# Altium PCB MainBoard_System_pcb.PcbDoc (part 2 of 3)
Units mm, origin at the board's own origin, x right, y up, seen from the top; angles counter-clockwise.
Board outline 57.35 x 57.35 mm, 2 copper layers (Top Layer, Bottom Layer); 82 components, 64 nets, 322 pads, 173 vias.
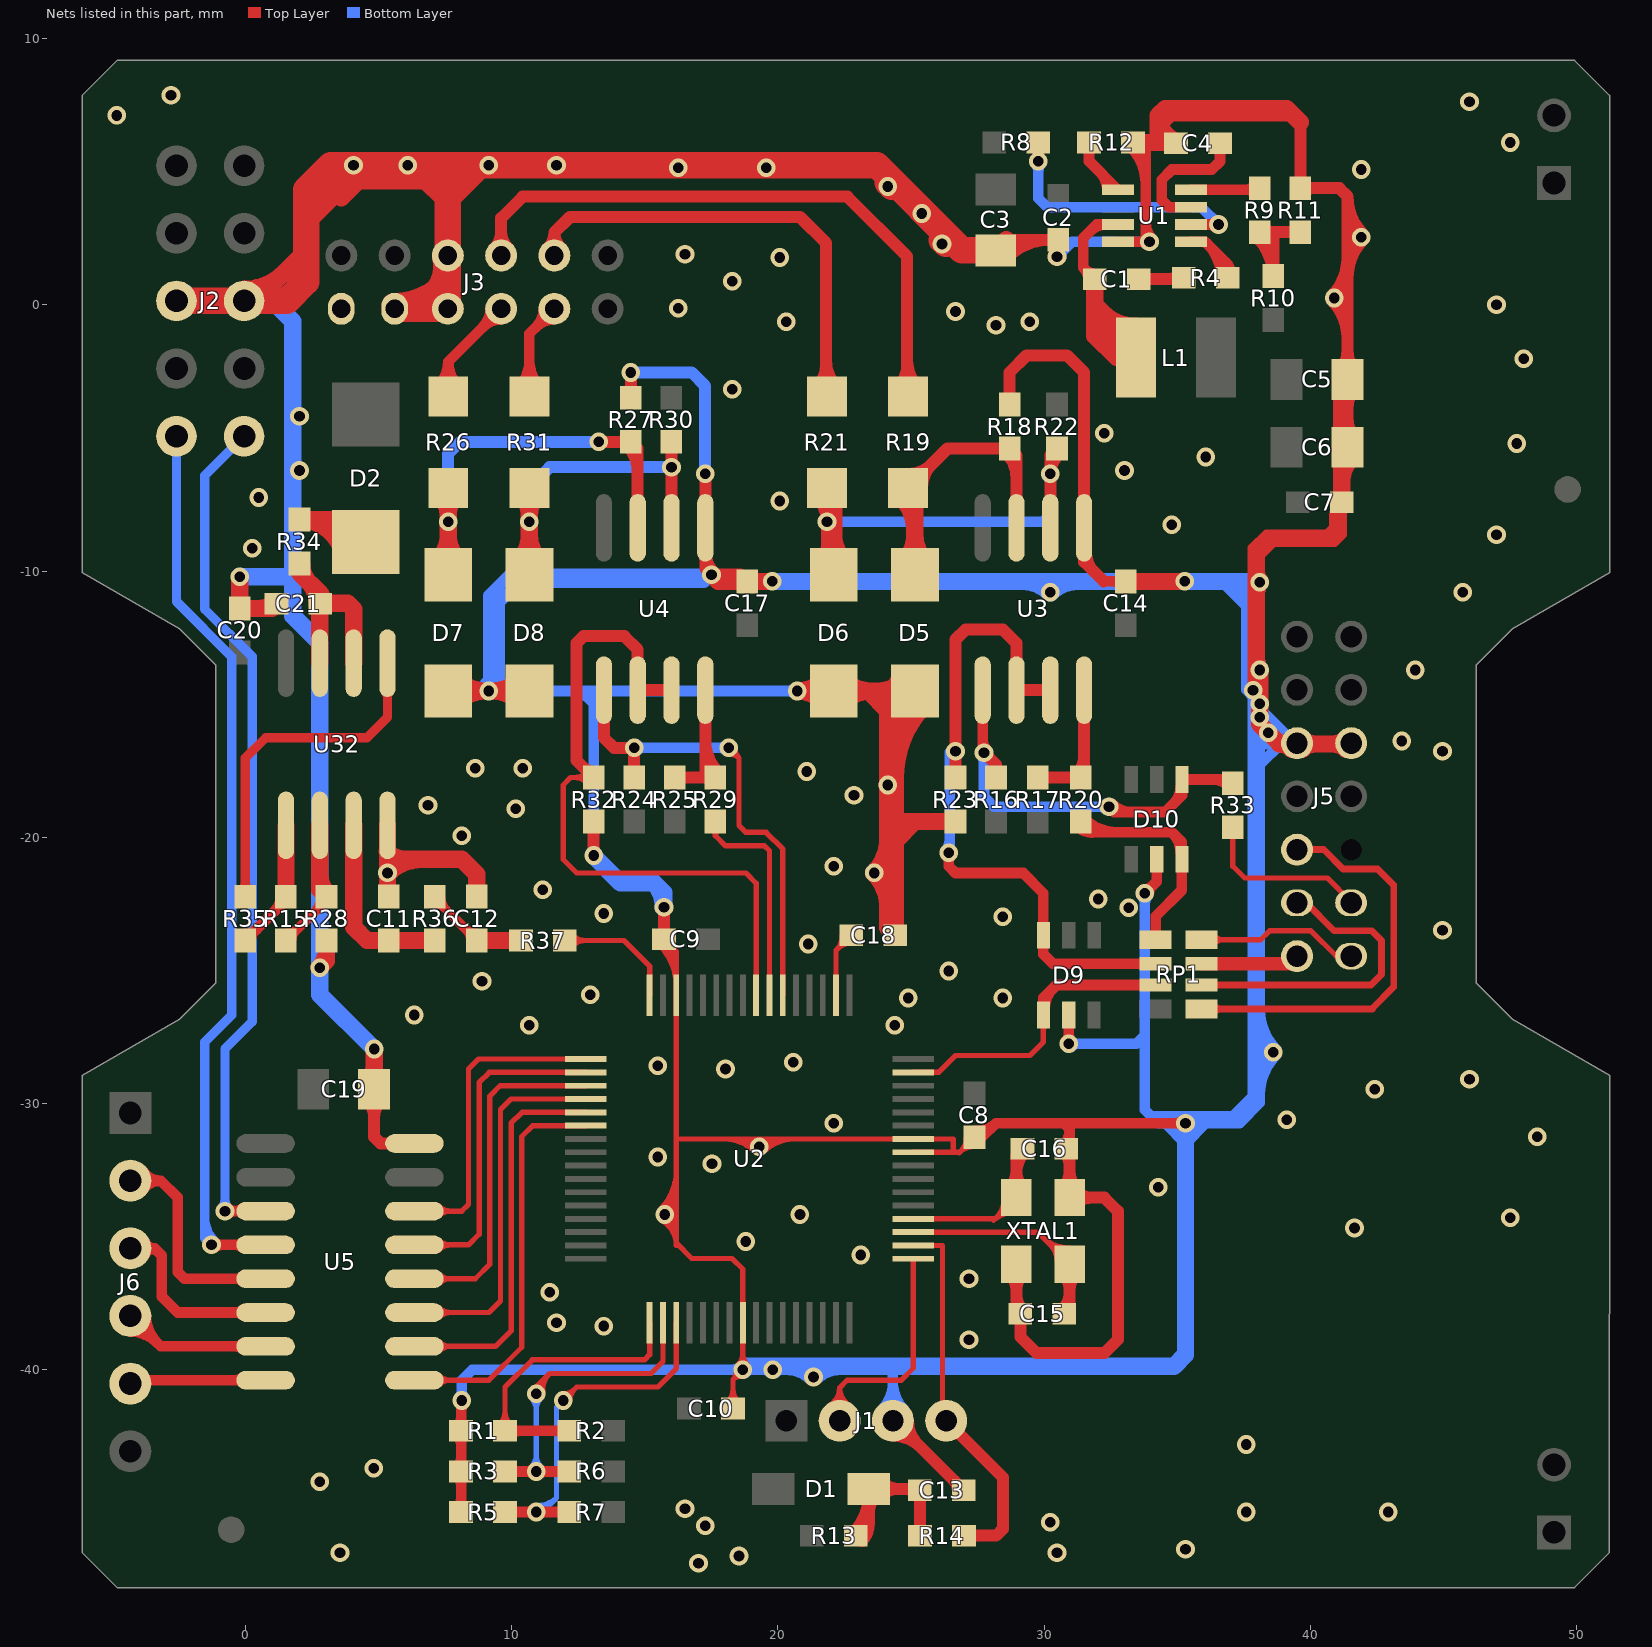
[diagram p2: the nets of this part, all layers, seen from the top]

## Via types
v1: diameter 0.7, hole 0.4, Top Layer to Bottom Layer, tented both sides, 173 vias

## Nets (pads, with @x,y where several pads share a name; then routed paths per layer and width w, separated by ;. In a path a pad name is that pad's centre, name@x,y a point inside that pad or via, vN(x,y) a via of type N, cw(c..) or ccw(c..) an arc to the next point about the centre after c; other vN are vias at no path point) (continued)
GND: C2.2 C3.1 C4.2 C5.1 C6.1 C7.1 C8.1 C9.1 C10.1 C11.1 C12.1 C13.1 C14.1 C15.2 C16.2 C17.1 C18.1 C19.2 C20.1 C21.2 D5.2 D6.2 D7.2 D8.2 D9.2 D10.2 J1.3 J2.5 J2.6 J3.2 J3.4 J3.5 J3.6 J5.5 J5.6 R1.1 R3.1 R5.1 R11.2 R12.1 R18.2 R23.1 R27.1 R28.1 R32.1 U1.4 U2.9 U2.10 U2.30 U2.56 U3.5 U4.5 U5.8 U32.4 XTAL1.2 XTAL1.4 | length 775.4
  Top Layer w0.2: C9.1@15.544,-24.043 cw(c13.997,-25.59) U2.30@16.185,-25.59 ; v1@15.571,-33.986 ccw(c14.089,-32.504) 16.185,-32.504 ; v1@15.628,-34.382 cw(c15.116,-35.321) 16.185,-35.321 ; C9.1@15.685,-23.901 cw(c14.479,-25.107) 16.185,-25.107 ; v1@15.713,-34.128 ccw(c14.572,-32.987) 16.185,-32.987 ; C9.1@15.723,-23.826 16.185,-24.288 U2.30@16.185,-25.927 16.185,-35.235 16.764,-35.814 18.279,-35.814 18.685,-36.22 U2.56@18.685,-38.227 v1(18.685,-39.989) 18.313,-40.361 ; v1@15.724,-34.207 cw(c15.3,-34.984) 16.185,-34.984 ; C9.1@15.787,-24.131 cw(c15.828,-24.607) 16.166,-24.269 cw(c16.449,-23.986) C9.1@16.059,-23.895 ; v1@15.82,-34.031 cw(c15.484,-34.647) 16.185,-34.647 ; C9.1@15.827,-23.76 cw(c14.962,-24.624) 16.185,-24.624 ; v1@15.854,-34.269 ccw(c15.055,-33.47) 16.185,-33.47 ; 15.916,-33.856 cw(c15.668,-34.31) 16.185,-34.31 ; v1@15.995,-34.41 ccw(c15.538,-33.953) 16.185,-33.953 ; 16.354,-31.327 U2.10@25.085,-31.327 26.585,-31.327 26.585,-31.742 ; 17.986,-31.327 cw(c17.986,-32.941) v1@19.127,-31.8 ; C10.1@18.097,-41.235 ccw(c17.574,-40.712) 18.313,-40.712 ccw(c19.053,-40.712) C10.1@18.53,-41.235 ; C10.1@18.313,-41.452 18.313,-40.361 ; v1@18.436,-40.015 cw(c18.011,-40.058) 18.313,-40.361 ; 18.469,-31.327 cw(c18.469,-32.458) v1@19.269,-31.658 ; v1@18.508,-39.812 ccw(c18.081,-39.385) 18.685,-39.385 ccw(c19.289,-39.385) v1@18.862,-39.812 ; v1@18.659,-40.238 ccw(c18.616,-40.663) 18.313,-40.361 ; 18.952,-31.327 cw(c18.952,-31.975) v1@19.41,-31.517 ; v1@19.198,-31.517 cw(c19.656,-31.975) 19.656,-31.327 ; v1@19.339,-31.658 cw(c20.139,-32.458) 20.139,-31.327 ; v1@19.481,-31.8 cw(c20.622,-32.941) 20.622,-31.327 ; U2.9@25.085,-31.827 26.822,-31.827 C8.1@27.382,-31.267 ; 26.803,-31.846 cw(c27.369,-32.411) C8.1@27.378,-31.612 ; 26.886,-31.764 ccw(c26.428,-31.305) C8.1@27.076,-31.305
  Top Layer w0.4: D7.2@7.119,-14.471 7.588,-14.471 D7.2@7.62,-14.503 ; R5.1@7.957,-45.193 ccw(c7.604,-44.841) 8.103,-44.841 ccw(c8.601,-44.841) R5.1@8.248,-45.193 ; R3.1@7.957,-43.961 cw(c7.604,-44.313) 8.103,-44.313 cw(c8.601,-44.313) R3.1@8.248,-43.961 ; R3.1@7.957,-43.669 ccw(c7.604,-43.317) 8.103,-43.317 ccw(c8.601,-43.317) R3.1@8.248,-43.669 ; R1.1@7.957,-42.437 cw(c7.604,-42.789) 8.103,-42.789 cw(c8.601,-42.789) R1.1@8.248,-42.437 ; R1.1@7.957,-42.145 ccw(c7.604,-41.793) 8.103,-41.793 ccw(c8.601,-41.793) R1.1@8.248,-42.145 ; R5.1@8.103,-45.339 R3.1@8.103,-43.815 R1.1@8.103,-42.291 v1@8.103,-41.173 ; 8.103,-41.572 cw(c8.552,-41.572) v1@8.234,-41.254 ; D8.2@10.636,-14.471 D8.2@10.668,-14.503 ; v1@20.832,-14.609 cw(c21.088,-14.865) 21.088,-14.503 cw(c21.088,-14.141) v1@20.832,-14.397 ; D6.2@21.426,-14.187 D6.2@21.742,-14.503 ; D6.2@21.531,-14.914 ccw(c20.726,-15.497) v1(20.726,-14.503) ; D6.2@21.531,-14.092 cw(c20.726,-13.509) v1(20.726,-14.503) ; D6.2@22.098,-14.503 v1(20.726,-14.503) ; v1@24.024,-18.14 cw(c23.768,-18.396) 24.13,-18.396 cw(c24.492,-18.396) v1@24.236,-18.14 ; v1@24.024,-17.928 ccw(c23.768,-17.672) 24.13,-17.672 ccw(c24.492,-17.672) v1@24.236,-17.928 ; 24.13,-18.746 cw(c29.289,-18.746) D5.2@25.641,-15.098 ; v1@24.13,-17.78 cw(c28.323,-17.78) D5.2@25.358,-14.815 ; 24.13,-16.814 cw(c27.357,-16.814) D5.2@25.075,-14.532 ; 24.13,-15.849 cw(c26.392,-15.849) D5.2@24.792,-14.249 ; 24.13,-14.883 cw(c25.426,-14.883) D5.2@24.51,-13.967 ; 24.13,-14.503 24.13,-18.796 24.409,-19.075 ; C18.1@24.263,-23.526 ccw(c23.911,-23.174) 24.409,-23.174 ccw(c24.908,-23.174) C18.1@24.555,-23.526 ; C18.1@24.409,-23.672 24.409,-19.075 ; R23.1@26.524,-19.551 ccw(c26.172,-19.904) 26.172,-19.406 ccw(c26.172,-18.907) R23.1@26.524,-19.26 ; R23.1@26.67,-19.406 25.146,-19.406 24.74,-19.406 24.409,-19.075 ; C8.1@27.382,-31.267 27.661,-31.267 28.194,-30.734 ; C8.1@27.4,-31.024 ccw(c27.486,-30.026) 28.194,-30.734 ; v1@30.374,1.907 ccw(c29.997,2.284) C2.2@30.53,2.284 ; C2.2@30.384,2.254 cw(c30.032,1.902) 30.53,1.902 cw(c31.028,1.902) C2.2@30.676,2.254 ; v1@30.53,1.851 C2.2@30.53,2.438 ; C16.2@30.728,-31.554 ccw(c30.177,-31.003) 30.956,-31.003 ; v1@30.816,-27.646 ccw(c30.56,-27.39) 30.922,-27.39 ccw(c31.284,-27.39) v1@31.028,-27.646 ; v1(30.922,-27.752) D9.2@30.922,-26.67 ; C16.2@30.956,-31.82 30.956,-30.956 30.734,-30.734 ; 32.287,-10.389 v1(35.285,-10.389) ; U1.4@32.766,2.368 v1(33.954,2.368) 33.817,2.505 33.817,5.941 ; C14.1@32.924,-10.535 ccw(c32.572,-10.887) 32.572,-10.389 ccw(c32.572,-9.89) C14.1@32.924,-10.243 ; C14.1@33.216,-10.535 cw(c33.568,-10.887) 33.568,-10.389 cw(c33.568,-9.89) C14.1@33.216,-10.243 ; R12.1@33.23,5.95 cw(c31.812,4.532) 33.817,4.532 ; R12.1@33.512,6.233 cw(c32.777,5.498) 33.817,5.498 ; v1(33.782,-22.098) 34.224,-21.656 D10.2@34.224,-20.828 ; v1@33.782,-21.948 ccw(c33.782,-21.586) 34.038,-21.842 ccw(c34.294,-22.098) v1@33.932,-22.098 ; 33.817,3.061 ccw(c34.647,3.061) v1@34.06,2.474 ; v1@33.848,2.262 ccw(c33.592,2.006) 33.592,2.368 ccw(c33.592,2.73) v1@33.848,2.474 ; v1@35.179,-10.495 ccw(c34.923,-10.751) 34.923,-10.389 ccw(c34.923,-10.026) v1@35.179,-10.283 ; v1@35.2,-30.84 ccw(c34.944,-31.096) 34.944,-30.734 ccw(c34.944,-30.372) v1@35.2,-30.628 ; v1(35.306,-30.734) 30.734,-30.734 ; v1@37.846,-14.207 37.846,-9.144 38.354,-8.636 40.64,-8.636 40.894,-8.382 40.894,-7.874 41.173,-7.595 C7.1@41.173,-7.416 41.173,-8.611 40.894,-8.89 38.608,-8.89 38.1,-9.398 v1(38.1,-10.414) v1@38.1,-14.461 ; v1@37.846,-13.486 ccw(c39.075,-13.486) 38.206,-14.355 ; 37.846,-12.741 ccw(c39.075,-12.741) 38.206,-13.61 cw(c38.462,-13.354) 38.1,-13.354 cw(c37.738,-13.354) v1@37.994,-13.61 ; 37.846,-11.389 cw(c39.075,-11.389) 38.206,-10.52 ccw(c38.462,-10.776) 38.1,-10.776 ccw(c37.738,-10.776) v1@37.994,-10.52 ; 37.846,-9.439 ccw(c39.075,-9.439) 38.206,-10.308 cw(c38.462,-10.052) 38.1,-10.052 cw(c37.738,-10.052) v1@37.994,-10.308 ; J5.5@39.497,-16.493 J5.6@41.529,-16.493 ; J5.5@39.78,-16.776 cw(c40.463,-17.459) 40.463,-16.493 cw(c40.463,-15.527) J5.5@39.78,-16.21 ; 40.894,-8.412 cw(c42.019,-8.412) C7.1@41.272,-7.57 ; 40.894,-7.934 cw(c41.211,-7.934) C7.1@41.165,-7.62 ; C7.1@41.027,-7.562 cw(c40.675,-7.914) 41.173,-7.914 cw(c41.672,-7.914) C7.1@41.319,-7.562 ; J5.6@41.246,-16.776 ccw(c40.563,-17.459) 40.563,-16.493 ccw(c40.563,-15.527) J5.6@41.246,-16.21 ; 28.194,-30.734 30.734,-30.734
  Top Layer w0.45: C19.2@4.571,-29.881 cw(c3.931,-30.521) 4.836,-30.521 cw(c5.741,-30.521) C19.2@5.101,-29.881 ; C19.2@4.836,-28.946 C19.2@4.836,-29.454 4.836,-31.252 5.08,-31.496 U5.8@6.35,-31.496 ; D7.2@7.62,-14.503 v1(9.144,-14.503) ; D7.2@8.12,-14.957 cw(c9.144,-15.886) v1(9.144,-14.503) ; D7.2@8.12,-14.049 ccw(c9.144,-13.12) v1(9.144,-14.503) ; D8.2@10.046,-14.765 ccw(c9.652,-14.93) 9.652,-14.503 ; D8.2@10.046,-14.241 cw(c9.652,-14.076) 9.652,-14.503 ; D8.2@10.168,-14.957 ccw(c9.144,-15.886) v1(9.144,-14.503) ; D8.2@10.168,-14.049 cw(c9.144,-13.12) v1(9.144,-14.503) ; R32.1@12.953,-19.572 cw(c12.643,-19.882) 13.081,-19.882 cw(c13.519,-19.882) R32.1@13.209,-19.572 ; v1(13.081,-20.684) R32.1@13.081,-19.406 ; R27.1@14.35,-3.326 ccw(c14.04,-3.016) 14.478,-3.016 ccw(c14.916,-3.016) R27.1@14.606,-3.326 ; R27.1@14.478,-3.492 v1(14.478,-2.54) ; C9.1@15.594,-23.698 ccw(c15.285,-23.388) 15.723,-23.388 ccw(c16.161,-23.388) C9.1@15.851,-23.698 ; C9.1@15.723,-23.826 v1(15.723,-22.631) ; U4.5@17.276,-9.275 ccw(c18.367,-9.275) v1@17.596,-10.046 ; v1@17.276,-6.354 U4.5@17.276,-8.375 17.276,-9.903 v1(17.507,-10.135) 18.592,-10.135 C17.1@18.846,-10.389 ; 17.887,-10.135 cw(c17.887,-11.31) C17.1@18.718,-10.479 ; D6.2@21.844,-14.503 D6.2@22.098,-14.503 23.368,-14.503 ; D6.2@22.657,-14.881 cw(c23.368,-15.36) 23.368,-14.503 ; D6.2@22.657,-14.125 ccw(c23.368,-13.646) 23.368,-14.503 ; J1.3@24.32,-42.472 cw(c24.32,-43.959) 25.371,-42.908 ; J1.3@24.373,-41.91 C13.1@26.979,-44.516 ; D5.2@24.669,-14.98 ccw(c23.516,-16.133) 23.516,-14.503 ccw(c23.516,-12.873) D5.2@24.669,-14.026 ; J1.3@24.882,-41.91 ccw(c26.111,-41.91) 25.242,-42.779 ; D5.2@25.146,-14.503 23.368,-14.503 ; C13.1@26.605,-44.141 cw(c26.23,-44.516) C13.1@26.76,-44.516 ; C3.1@28.293,2.095 cw(c29.122,1.266) 29.122,2.438 ; R18.2@28.574,-3.58 ccw(c28.264,-3.27) 28.702,-3.27 ccw(c29.14,-3.27) R18.2@28.83,-3.58 ; C3.1@28.58,2.438 C2.2@30.53,2.438 ; C3.1@28.611,1.777 cw(c30.208,0.18) C2.2@30.208,2.438 ; R18.2@28.702,-3.746 28.702,-2.54 29.337,-1.905 30.861,-1.905 31.5,-2.544 U3.5@31.5,-8.375 31.5,-9.652 32.237,-10.389 ; XTAL1.2@28.709,-36.4 cw(c28.111,-36.998) 28.956,-36.998 cw(c29.801,-36.998) XTAL1.2@29.203,-36.4 ; C15.2@28.956,-37.896 XTAL1.2@28.956,-36.028 ; 28.956,-37.182 ccw(c29.784,-37.182) C15.2@29.199,-37.768 ; C15.2@28.98,-38.024 cw(c28.67,-38.334) 29.108,-38.334 cw(c29.546,-38.334) C15.2@29.237,-38.024 ; C15.2@29.108,-37.896 29.108,-38.76 29.718,-39.37 32.258,-39.37 32.766,-38.862 32.766,-34.036 32.258,-33.528 XTAL1.4@30.956,-33.528 C16.2@30.956,-31.82 ; C2.2@30.402,2.31 ccw(c30.092,2) 30.092,2.438 ccw(c30.092,2.876) C2.2@30.402,2.567 ; XTAL1.4@30.709,-33.156 ccw(c30.111,-32.558) 30.956,-32.558 ccw(c31.801,-32.558) XTAL1.4@31.203,-33.156 ; C16.2@30.745,-31.828 cw(c30.237,-32.337) 30.956,-32.337 ; XTAL1.4@31.203,-33.775 cw(c31.801,-34.373) 31.801,-33.528 cw(c31.801,-32.683) XTAL1.4@31.203,-33.281 ; U3.5@31.58,-9.34 ccw(c32.525,-9.34) 31.857,-10.009 ; R12.1@33.337,6.096 34.29,6.096 ; R12.1@33.504,5.968 cw(c33.814,5.658) 33.814,6.096 cw(c33.814,6.534) R12.1@33.504,6.224 ; C4.2@34.924,6.096 34.29,6.096 ; R11.2@39.496,4.548 ccw(c39.186,4.858) 39.624,4.858 ccw(c40.062,4.858) R11.2@39.752,4.548 ; R11.2@39.752,4.253 cw(c40.062,3.944) 40.062,4.381 cw(c40.062,4.819) R11.2@39.752,4.51 ; v1@40.806,0.166 cw(c39.39,-1.25) 41.392,-1.25 ; v1@40.806,0.342 ccw(c39.39,1.758) 41.392,1.758 ; C7.1@41.045,-7.288 ccw(c40.735,-6.978) 41.173,-6.978 ccw(c41.611,-6.978) C7.1@41.302,-7.288 ; v1@41.124,0.024 ccw(c40.476,0.672) 41.392,0.672 ; v1@41.124,0.484 cw(c40.476,-0.164) 41.392,-0.164 ; C6.1@41.127,-4.917 ccw(c40.487,-4.277) 41.392,-4.277 ccw(c42.297,-4.277) C6.1@41.657,-4.917 ; C5.1@41.127,-3.231 cw(c40.487,-3.871) 41.392,-3.871 cw(c42.297,-3.871) C5.1@41.657,-3.231 ; C5.1@41.127,-2.377 ccw(c40.487,-1.737) 41.392,-1.737 ccw(c42.297,-1.737) C5.1@41.657,-2.377 ; C7.1@41.173,-7.416 41.173,-5.563 C6.1@41.392,-5.344 C5.1@41.392,-2.804 41.392,4.074 ; 41.173,-6.939 cw(c42.825,-6.939) C6.1@41.657,-5.771 ; 41.392,0.988 cw(c43.462,0.988) v1@41.998,2.452 ; 41.392,2.074 cw(c42.376,2.074) v1@41.68,2.77 ; 41.392,3 ccw(c42.363,3) v1@41.682,2.308 ; v1@41.998,2.629 cw(c43.418,4.074) 41.392,4.074 ; v1(9.144,-14.503) 9.652,-14.503 ; 34.29,6.096 34.29,6.604 34.798,7.112 39.37,7.112 39.624,6.858 R11.2@39.624,4.381 41.084,4.381 41.392,4.074 ; 34.409,6.096 cw(c34.409,5.566) C4.2@34.784,5.941 ; 34.409,6.096 cw(c34.409,5.566) C4.2@34.784,5.941 ; 34.409,6.096 cw(c34.409,5.566) C4.2@34.784,5.941
  Top Layer w0.65: v1(-0.204,-10.21) C20.1@-0.204,-11.405 0.99,-11.405 C21.2@1.168,-11.226 ; J2.5@-0.046,0.146 0.4,0.146 2.286,2.032 ; J2.5@-0.046,0.583 ccw(c-0.046,2.715) 1.461,1.207 ; 0.503,-11.405 ccw(c0.503,-10.598) C21.2@1.073,-11.168 ; v1@2.776,-24.874 ccw(c2.12,-24.218) R28.1@3.048,-24.218 ; v1(2.794,-24.892) 3.048,-24.638 R28.1@3.048,-23.876 ; 3.607,4.024 4.826,5.243 ; C19.2@4.642,-29.098 ccw(c4.172,-28.628) 4.836,-28.628 ccw(c5.5,-28.628) C19.2@5.03,-29.098 ; C19.2@4.836,-29.454 v1(4.836,-27.95) ; U32.4@5.324,-20.531 ccw(c6.042,-19.813) 6.042,-20.828 ; C11.1@5.338,-22.177 5.338,-20.828 ; U32.4@5.338,-19.551 5.338,-20.828 ; v1@5.356,-21.354 cw(c6.625,-22.623) 6.625,-20.828 ; D7.2@7.62,-14.503 D8.2@10.668,-14.503 ; D7.2@8.027,-14.91 cw(c9.008,-15.891) 9.008,-14.503 cw(c9.008,-13.115) D7.2@8.027,-14.096 ; C12.1@8.686,-22.223 8.686,-21.386 8.128,-20.828 5.338,-20.828 ; D8.2@10.261,-14.91 ccw(c9.28,-15.891) 9.28,-14.503 ccw(c9.28,-13.115) D8.2@10.261,-14.096 ; v1(17.507,-10.135) 17.761,-10.389 ; C17.1@18.846,-10.389 17.761,-10.389 ; v1(19.787,-10.389) 17.761,-10.389 ; D6.2@21.688,-14.906 ccw(c20.726,-15.852) v1(20.726,-14.503) ; D6.2@21.688,-14.1 cw(c20.726,-13.154) v1(20.726,-14.503) ; D6.2@22.098,-14.503 D5.2@25.146,-14.503 v1(20.726,-14.503) ; 23.393,-14.503 24.13,-15.24 ; v1@23.604,-21.354 cw(c22.335,-22.623) 24.13,-22.623 ; v1@23.604,-21.318 ccw(c22.335,-20.049) 24.13,-20.049 ; v1@24.112,-18.052 cw(c23.395,-18.769) 24.409,-18.769 ; v1@24.112,-18.016 ccw(c23.395,-17.299) 24.409,-17.299 ; 24.13,-22.893 ccw(c25.15,-22.893) C18.1@24.429,-23.614 ; 24.13,-18.444 cw(c28.987,-18.444) 25.553,-15.01 ccw(c28.312,-17.769) 24.409,-17.769 ; 24.13,-16.875 cw(c27.418,-16.875) 25.093,-14.55 ccw(c26.743,-16.2) 24.409,-16.2 ; 24.13,-15.306 cw(c25.849,-15.306) D5.2@24.633,-14.09 ; 24.13,-14.503 24.13,-23.393 C18.1@24.409,-23.672 D5.2@24.409,-14.782 ; 24.409,-20.142 25.146,-19.406 ; 24.409,-20.066 24.74,-19.736 24.74,-19.406 ; 24.409,-19.304 24.511,-19.406 R23.1@26.67,-19.406 ; C3.1@28.184,2.042 C3.1@28.58,2.438 ; C14.1@33.02,-10.389 v1(35.285,-10.389) ; R12.1@33.337,6.096 C4.2@34.924,6.096 ; 34.29,6.096 34.29,7.112 ; C4.2@34.943,6.145 cw(c35.333,7.112) 34.29,7.112 ; v1(38.1,-13.716) v1(38.1,-14.986) 38.1,-15.748 38.845,-16.493 J5.6@41.529,-16.493 ; J5.5@39.303,-16.687 ccw(c38.833,-17.157) 38.833,-16.493 ccw(c38.833,-15.829) J5.5@39.303,-16.299 ; 39.624,6.858 39.116,7.366 34.544,7.366 34.29,7.112 ; J5.5@39.691,-16.687 cw(c40.161,-17.157) 40.161,-16.493 cw(c40.161,-15.829) J5.5@39.691,-16.299 ; C7.1@41.173,-7.416 41.173,-3.023 C5.1@41.392,-2.804 ; 41.173,-6.698 cw(c42.584,-6.698) C6.1@41.586,-5.7 ; 41.173,-4.158 cw(c42.584,-4.158) C5.1@41.586,-3.16 ; 41.173,-3.99 ccw(c42.584,-3.99) C6.1@41.586,-4.988 ; J5.6@41.335,-16.687 ccw(c40.865,-17.157) 40.865,-16.493 ccw(c40.865,-15.829) J5.6@41.335,-16.299 ; 23.486,-14.503 ccw(c23.486,-15.891) 22.505,-14.91 cw(c23.486,-15.891) 23.486,-14.503 ; 23.486,-14.503 cw(c23.486,-13.115) 22.505,-14.096 ccw(c23.486,-13.115) 23.486,-14.503 ; 23.758,-14.503 ccw(c23.758,-13.115) 24.739,-14.096 cw(c23.758,-13.115) 23.758,-14.503 ; 23.758,-14.503 cw(c23.758,-15.891) 24.739,-14.91 ccw(c23.758,-15.891) 23.758,-14.503 ; v1@17.525,-10.117 ccw(c18.181,-9.461) 18.181,-10.389 cw(c18.181,-9.461) v1@17.525,-10.117
  Top Layer w1: J2.6@-2.586,0.146 J2.5@-0.046,0.146 1.563,0.146 2.286,0.869 2.286,2.032 2.286,2.794 ; 3.607,4.623 v1@4.227,5.243 ; J3.4@5.607,-0.149 J3.6@7.607,-0.149 7.607,1.016 ; J3.4@5.607,-0.049 ccw(c5.607,2.6) 7.48,0.727 ; 6.604,-0.149 7.607,0.854 7.607,1.016 ; 7.103,0.35 ccw(c6.006,1.446) J3.5@7.51,1.826 ; 8.786,5.243 7.607,4.064 6.845,4.826 3.81,4.826 ; 24.117,4.839 cw(c23.722,4.445) v1@24.28,4.445 ; v1@24.13,4.595 cw(c24.13,4.037) 24.524,4.432 ; 26.059,2.897 cw(c25.448,2.286) v1@26.312,2.286 ; v1@26.162,2.436 cw(c26.162,1.572) 26.773,2.183 ; C3.1@28.184,2.042 26.914,2.042 23.713,5.243 7.62,5.243 ; 2.286,2.794 2.286,4.318 ; 2.286,2.794 2.286,3.302 2.794,3.81 v1@4.227,5.243 ; 2.286,4.318 3.211,5.243 v1(6.096,5.243) ; 2.286,4.318 2.794,4.826 3.81,4.826 ; 3.81,4.826 v1@4.227,5.243 ; v1@4.227,5.243 v1(6.096,5.243) ; v1(6.096,5.243) 7.62,5.243 ; 7.607,1.016 J3.5@7.607,1.851 7.607,5.23 7.62,5.243
  Bottom Layer w0.4: v1@8.022,-41.042 ccw(c7.766,-40.786) 8.128,-40.786 ccw(c8.49,-40.786) v1@8.234,-41.042 ; v1(8.128,-41.148) 8.128,-40.386 8.525,-39.989 v1(18.685,-39.989) 24.32,-39.989 ; v1@12.975,-20.578 ccw(c12.719,-20.322) 13.081,-20.322 ccw(c13.443,-20.322) v1@13.187,-20.578 ; v1(13.081,-20.684) 13.081,-14.63 ; 13.564,-14.503 13.081,-14.986 12.598,-14.503 v1(9.144,-14.503) v1(20.726,-14.503) ; v1(15.723,-22.631) v1@15.723,-22.581 ; v1@18.579,-40.095 ccw(c18.323,-40.351) 18.323,-39.989 ccw(c18.323,-39.627) v1@18.579,-39.883 ; v1@18.791,-40.095 cw(c19.047,-40.351) 19.047,-39.989 cw(c19.047,-39.627) v1@18.791,-39.883 ; v1@19.706,-40.095 ccw(c19.45,-40.351) 19.45,-39.989 ccw(c19.45,-39.627) v1@19.706,-39.883 ; v1@19.918,-40.095 cw(c20.174,-40.351) 20.174,-39.989 cw(c20.174,-39.627) v1@19.918,-39.883 ; 20.299,-39.989 cw(c20.299,-41.306) v1@21.23,-40.375 ; v1@20.62,-14.609 ccw(c20.364,-14.865) 20.364,-14.503 ccw(c20.364,-14.141) v1@20.62,-14.397 ; v1@21.442,-40.375 cw(c22.373,-41.306) 22.373,-39.989 ; J1.3@23.905,-41.495 ccw(c22.902,-40.492) 24.32,-40.492 ccw(c25.738,-40.492) J1.3@24.735,-41.495 ; J1.3@24.32,-41.91 24.32,-39.989 ; v1(30.48,1.801) 31.047,2.368 v1(33.954,2.368) ; v1@30.48,1.951 ccw(c30.48,2.313) 30.736,2.057 ccw(c30.992,1.801) v1@30.63,1.801 ; v1(30.922,-27.752) 33.462,-27.752 33.782,-27.432 ; v1@31.028,-27.858 cw(c31.284,-28.114) 31.284,-27.752 cw(c31.284,-27.39) v1@31.028,-27.646 ; v1@33.676,-22.204 cw(c33.42,-22.46) 33.782,-22.46 cw(c34.144,-22.46) v1@33.888,-22.204 ; v1(33.782,-22.098) 33.782,-27.432 ; v1@33.848,2.262 ccw(c33.592,2.006) 33.592,2.368 ccw(c33.592,2.73) v1@33.848,2.474 ; 34.036,-30.48 37.084,-30.48 37.846,-29.718 37.846,-15.748 ; 34.331,-30.48 cw(c34.331,-31.709) v1@35.2,-30.84 ; v1@35.2,-30.628 cw(c34.944,-30.372) 34.944,-30.734 cw(c34.944,-31.096) v1@35.2,-30.84 ; v1@35.412,-30.628 ccw(c35.668,-30.372) 35.668,-30.734 ccw(c35.668,-31.096) v1@35.412,-30.84 ; 36.068,-30.734 35.306,-31.496 34.544,-30.734 ; 36.281,-30.48 ccw(c36.281,-31.709) v1@35.412,-30.84 ; 37.592,-13.093 ccw(c38.723,-13.093) v1@37.923,-13.893 ; 37.592,-12.127 ccw(c39.689,-12.127) v1@38.206,-13.61 ; 37.592,-12.003 cw(c39.689,-12.003) v1@38.206,-10.52 ; 37.592,-11.037 cw(c38.723,-11.037) v1@37.923,-10.237 ; 37.677,-10.389 cw(c37.677,-10.837) 37.994,-10.52 cw(c37.738,-10.776) 38.1,-10.776 cw(c38.462,-10.776) v1@38.206,-10.52 ; 37.846,-12.741 ccw(c39.075,-12.741) v1@38.206,-13.61 ; 37.846,-11.389 cw(c39.075,-11.389) v1@38.206,-10.52 ; v1@37.994,-13.61 ccw(c37.738,-13.354) 38.1,-13.354 ccw(c38.462,-13.354) v1@38.206,-13.61 ; 38.1,-29.656 cw(c40.197,-29.656) v1@38.714,-28.173 ; 38.1,-28.69 cw(c39.231,-28.69) v1@38.431,-27.89 ; 38.1,-27.444 ccw(c39.231,-27.444) v1@38.431,-28.244 ; 38.1,-26.478 ccw(c40.197,-26.478) v1@38.714,-27.961 ; 38.1,-17.272 38.911,-16.461 J5.5@39.497,-16.461 J5.5@39.448,-16.51 ; v1(38.1,-13.716) v1(38.1,-15.494) ; 38.845,-16.493 38.1,-15.748 v1(38.1,-15.494) ; J5.5@39.214,-16.776 ccw(c38.531,-17.459) 38.531,-16.493 ccw(c38.531,-15.527) J5.5@39.214,-16.21 ; J5.5@39.78,-16.776 cw(c40.463,-17.459) 40.463,-16.493 cw(c40.463,-15.527) J5.5@39.78,-16.21 ; J5.6@41.246,-16.776 ccw(c40.563,-17.459) 40.563,-16.493 ccw(c40.563,-15.527) J5.6@41.246,-16.21 ; 9.506,-14.503 ccw(c9.506,-14.865) 9.25,-14.609 cw(c9.506,-14.865) 9.506,-14.503 ; 9.506,-14.503 cw(c9.506,-14.141) 9.25,-14.397 ccw(c9.506,-14.141) 9.506,-14.503 ; 24.32,-39.989 34.798,-39.989 35.306,-39.481 v1(35.306,-30.734) ; 33.782,-27.432 33.782,-30.226 34.29,-30.734 34.544,-30.734 ; 34.544,-30.734 v1(35.306,-30.734) ; v1@35.2,-30.84 cw(c34.944,-31.096) 35.306,-31.096 ; v1@35.2,-30.84 cw(c34.944,-31.096) 35.306,-31.096 ; 35.306,-31.096 cw(c35.668,-31.096) v1@35.412,-30.84 ; 35.306,-31.096 cw(c35.668,-31.096) v1@35.412,-30.84 ; v1(35.306,-30.734) 37.338,-30.734 38.1,-29.972 38.1,-16.51 ; 37.846,-15.748 37.846,-14.715 37.592,-14.461 37.592,-10.389 v1@38.075,-10.389 ; 37.846,-15.748 37.846,-13.97 37.846,-10.617 v1@38.075,-10.389 ; v1@37.994,-15.092 cw(c37.738,-15.348) v1@38.1,-15.348 ; v1@37.994,-15.092 cw(c37.738,-15.348) v1@38.1,-15.348 ; v1@37.994,-15.092 cw(c37.738,-15.348) v1@38.1,-15.348 ; v1@37.994,-15.092 cw(c37.738,-15.348) v1@38.1,-15.348 ; v1@38.075,-10.389 v1(38.1,-10.414) v1(38.1,-14.986) ; 38.1,-16.51 v1(38.1,-15.494) ; 38.1,-16.51 J5.5@39.448,-16.51 ; v1(38.1,-15.494) v1(38.1,-14.986) ; v1(38.1,-14.986) 38.1,-15.162 J5.5@39.448,-16.51
  Bottom Layer w0.45: v1@9.042,-14.194 cw(c9.266,-14.872) 9.77,-14.367 ; v1(9.144,-14.503) 9.144,-13.716 ; v1@9.269,-14.503 cw(c9.938,-14.503) 9.465,-14.03 ; v1@9.269,-14.499 cw(c9.884,-14.481) 9.449,-14.046 9.525,-13.97 9.525,-11.176 10.287,-10.414 17.228,-10.414 v1(17.507,-10.135) 9.931,-10.135 9.144,-10.922 9.144,-13.716 ; 9.906,-14.503 9.144,-13.741 9.144,-13.716 ; v1(14.478,-2.54) 16.764,-2.54 17.272,-3.048 v1(17.272,-6.35) ; 16.531,-10.414 ccw(c16.531,-9.158) v1@17.419,-10.046
  Bottom Layer w0.65: J2.6@-2.586,0.146 J2.5@-0.046,0.146 ; J2.6@-2.277,-0.163 cw(c-1.531,-0.909) -1.531,0.146 cw(c-1.531,1.201) J2.6@-2.277,0.455 ; J2.5@-0.355,-0.163 ccw(c-1.101,-0.909) -1.101,0.146 ccw(c-1.101,1.201) J2.5@-0.355,0.455 ; v1(-0.204,-10.21) 1.728,-10.21 ; J2.5@0.108,0.146 1.016,0.146 ; J2.5@0.263,-0.163 cw(c1.009,-0.909) 1.009,0.146 cw(c1.009,1.201) J2.5@0.263,0.455 ; 1.216,-0.054 1.778,-0.616 1.778,-11.684 2.794,-12.7 v1(2.794,-24.892) 2.794,-25.908 v1(4.836,-27.95) ; v1(13.081,-20.684) 13.081,-20.701 14.097,-21.717 15.367,-21.717 15.723,-22.073 v1(15.723,-22.631) ; 15.285,-21.635 cw(c14.288,-22.631) v1@15.698,-22.631 ; v1(18.685,-39.989) 18.81,-39.864 34.88,-39.864 35.306,-39.438 v1(35.306,-30.734) ; v1@18.703,-40.007 cw(c19.047,-40.351) 19.047,-39.864 ; 19.45,-39.864 cw(c19.45,-40.351) v1@19.794,-40.007 ; v1(19.787,-10.389) 36.83,-10.389 ; v1@19.83,-40.007 cw(c20.174,-40.351) 20.174,-39.864 ; 20.299,-39.864 cw(c20.299,-41.306) v1@21.318,-40.286 ; v1@21.354,-40.286 cw(c22.373,-41.306) 22.373,-39.864 ; 29.185,-10.389 cw(c29.185,-11.836) v1@30.208,-10.813 ; v1@30.244,-10.813 cw(c31.267,-11.836) 31.267,-10.389 ; 37.846,-11.43 37.846,-11.405 36.83,-10.389 ; v1@38.075,-10.389 36.83,-10.389
  other v1: 17.018,-47.257 18.542,-46.99 3.556,-46.863 30.48,-46.863 35.306,-46.736 17.272,-45.847 30.226,-45.72 37.592,-45.339 42.926,-45.339 16.51,-45.212 2.794,-44.196 4.826,-43.688 37.592,-42.799 21.336,-40.269 19.812,-39.989 27.178,-38.862 13.462,-38.354 11.684,-38.227 11.43,-37.084 27.178,-36.576 23.114,-35.687 18.796,-35.179 41.656,-34.671 47.498,-34.29 15.748,-34.163 20.828,-34.163 34.29,-33.147 17.526,-32.258 15.494,-32.004 19.304,-31.623 48.514,-31.242 22.098,-30.734 39.116,-30.607 42.418,-29.464 45.974,-29.083 18.034,-28.702 15.494,-28.575 20.574,-28.448 38.608,-28.067 10.668,-27.051 24.384,-27.051 6.35,-26.67 24.892,-26.035 28.448,-26.035 12.954,-25.908 8.89,-25.4 26.416,-25.019 21.139,-24.003 44.958,-23.495 28.448,-22.987 13.462,-22.86 33.183,-22.642 32.026,-22.316 11.176,-21.971 5.338,-21.336 23.622,-21.336 22.098,-21.082 8.128,-19.939 10.16,-18.923 6.858,-18.796 22.86,-18.415 24.13,-18.034 21.082,-17.526 8.636,-17.399 10.414,-17.399 44.958,-16.764 43.434,-16.383 38.421,-16.069 37.846,-14.478 43.942,-13.716 30.226,-10.795 45.72,-10.795 0.254,-9.144 46.99,-8.636 34.798,-8.255 20.066,-7.366 0.508,-7.239 2.032,-6.223 33.02,-6.223 36.068,-5.715 47.752,-5.207 32.258,-4.826 2.032,-4.191 18.288,-3.175 48.006,-2.032 28.194,-0.762 20.32,-0.635 29.464,-0.635 26.67,-0.254 16.256,-0.127 46.99,0 40.894,0.254 18.288,0.889 20.066,1.778 16.51,1.905 26.162,2.286 41.91,2.54 25.4,3.429 24.13,4.445 41.91,5.08 16.256,5.143 19.558,5.143 4.064,5.243 9.144,5.243 11.684,5.243 47.498,6.096 -4.826,7.112 45.974,7.62 -2.794,7.874
NetC1_1: C1.1 R4.1 | length 2.8
  Top Layer w0.45: C1.1@33.553,0.966 R4.1@35.193,0.966 ; C1.1@33.72,0.838 cw(c34.029,0.528) 34.029,0.966 cw(c34.029,1.404) C1.1@33.72,1.094 ; 34.646,0.966 ccw(c34.646,1.575) R4.1@35.076,1.144
NetC1_2: C1.2 L1.1 U1.3 | length 21.2
  Top Layer w0.4: 31.485,1.383 cw(c31.068,0.966) C1.2@31.658,0.966 ; C1.2@31.577,1.291 ccw(c31.864,1.579) C1.2@31.864,1.172 ; 31.697,2.741 cw(c32.366,2.072) 32.366,3.018 ccw(c32.268,2.332) 31.778,2.822 ; C1.2@31.902,0.966 31.465,1.403 31.465,2.509 31.974,3.018 U1.3@32.766,3.018
  Top Layer w0.45: C1.2@31.774,0.838 cw(c31.464,0.528) 31.902,0.528 cw(c32.34,0.528) C1.2@32.031,0.838 ; C1.2@31.902,0.966 31.902,-0.508 31.902,-1.168 32.715,-1.981 L1.1@33.449,-1.981
  Top Layer w0.65: 31.902,-0.508 33.376,-1.981 L1.1@33.449,-1.981 ; 31.902,0 33.449,-1.547 L1.1@33.449,-1.981 ; C1.2@31.902,0.966 31.902,-1.168 32.715,-1.981 L1.1@33.449,-1.981 ; 32.185,-0.283 ccw(c33.449,0.981) L1.1@33.449,-0.806 ; 32.314,-0.92 ccw(c32.737,-0.497) L1.1@33.153,-0.926
NetC4_1: C4.1 U1.7 | length 5.9
  Top Layer w0.4: U1.7@35.512,3.668 34.686,3.668 34.417,3.937 34.417,4.699 34.798,5.08 36.299,5.08 36.601,5.383 C4.1@36.601,6.069 ; C4.1@36.455,5.923 cw(c36.103,5.571) 36.601,5.571 cw(c37.1,5.571) C4.1@36.747,5.923
NetC11_2: C11.2 R36.2 U32.3 | length 7.1
  Top Layer w0.65: U32.3@4.068,-19.551 4.068,-23.372 4.57,-23.874 C11.2@5.384,-23.874 ; C11.2@5.386,-23.876 R36.2@7.112,-23.876
NetC12_2: C12.2 R36.1 R37.2 | length 5.7
  Top Layer w0.35: R36.1@7.112,-22.495 cw(c7.112,-23.006) R36.1@7.474,-22.644 ; R36.1@7.112,-22.283 C12.2@8.686,-23.857 ; R36.1@7.343,-22.263 ccw(c7.949,-22.263) 7.521,-22.691 ; 8.255,-23.426 ccw(c8.686,-22.995) C12.2@8.686,-23.604 ; C12.2@8.306,-23.476 cw(c7.947,-23.836) C12.2@8.455,-23.836
  Top Layer w0.65: C12.2@8.686,-23.857 C12.2@8.686,-23.874 R37.2@10.348,-23.874
NetC13_2: C13.2 D1.2 R13.1 R14.1 | length 12.9
  Top Layer w0.45: R13.1@22.833,-46.1 ccw(c21.417,-44.683) D1.2@23.42,-44.683 ; R13.1@22.924,-46.228 23.42,-45.731 D1.2@23.42,-44.466 C13.2@25.278,-44.466 ; R13.1@23.143,-46.228 cw(c23.673,-46.228) R13.1@23.298,-45.853 ; R13.1@23.152,-46.418 ccw(c22.503,-45.77) 23.42,-45.77 ; D1.2@23.155,-44.731 cw(c22.515,-45.371) 23.42,-45.371 cw(c24.325,-45.371) D1.2@23.685,-44.731 ; D1.2@23.885,-44.731 cw(c24.525,-45.371) 24.525,-44.466 cw(c24.525,-43.561) D1.2@23.885,-44.201 ; 24.732,-44.466 cw(c24.732,-45.075) C13.2@25.162,-44.644 ; C13.2@25.2,-44.644 cw(c24.89,-44.954) 25.328,-44.954 cw(c25.766,-44.954) C13.2@25.457,-44.644 ; R14.1@25.208,-46.1 ccw(c24.918,-45.81) 25.328,-45.81 ; R14.1@25.328,-46.22 C13.2@25.328,-44.516 ; 25.328,-45.771 ccw(c25.794,-45.771) R14.1@25.465,-46.1
NetC15_1: C15.1 U2.3 XTAL1.3 | length 12.7
  Top Layer w0.2: U2.3@25.085,-34.827 29.755,-34.827 XTAL1.3@30.956,-36.028 ; 29.932,-35.004 ccw(c30.956,-33.979) XTAL1.3@30.956,-35.428 ; 30.234,-35.306 cw(c29.636,-35.903) XTAL1.3@30.481,-35.903 ; 30.273,-35.345 ccw(c30.956,-34.662) XTAL1.3@30.956,-35.628
  Top Layer w0.45: C15.1@30.669,-37.768 ccw(c29.977,-37.075) 30.956,-37.075 ; XTAL1.3@30.709,-36.4 cw(c30.111,-36.998) 30.956,-36.998 cw(c31.801,-36.998) XTAL1.3@31.203,-36.4 ; C15.1@30.956,-37.699 XTAL1.3@30.956,-36.028
NetC16_1: C16.1 U2.4 XTAL1.1 | length 10.1
  Top Layer w0.2: U2.4@25.085,-34.327 28.157,-34.327 XTAL1.1@28.956,-33.528 ; 28.095,-34.389 cw(c28.759,-35.054) XTAL1.1@28.89,-34.123 ; 28.234,-34.25 ccw(c27.636,-33.653) XTAL1.1@28.481,-33.653 ; 28.378,-34.106 cw(c28.829,-34.557) XTAL1.1@28.918,-33.925
  Top Layer w0.45: XTAL1.1@28.709,-33.156 ccw(c28.111,-32.558) 28.956,-32.558 ccw(c29.801,-32.558) XTAL1.1@29.203,-33.156 ; XTAL1.1@28.956,-33.528 C16.1@28.956,-31.929 ; 28.956,-32.598 cw(c30.044,-32.598) C16.1@29.275,-31.828
NetC18_2: C18.2 U2.18 | length 3.6
  Top Layer w0.2: U2.18@22.185,-25.927 22.185,-24.245 C18.2@22.758,-23.672 ; 22.204,-24.226 ccw(c21.695,-23.717) C18.2@22.414,-23.686 ; 22.262,-24.168 cw(c22.72,-24.626) C18.2@22.72,-23.978
NetC21_1: C21.1 R34.1 U32.6 U32.7 | length 9.1
  Top Layer w0.65: R34.1@2.032,-9.716 2.032,-10.058 2.832,-10.858 2.832,-11.214 3.848,-11.214 4.068,-11.434 U32.6@4.068,-13.455 ; R34.1@2.113,-9.754 ccw(c3.045,-9.754) 2.386,-10.412 ; 2.346,-10.372 cw(c1.493,-11.226) C21.1@2.7,-11.226 ; U32.7@2.798,-13.455 C21.1@2.798,-11.226
NetD2_2: D2.2 R34.2 | length 6.6
  Top Layer w0.65: 2.943,-8.064 cw(c2.943,-9.434) D2.2@4.238,-8.989 ; D2.2@3.624,-9.2 ccw(c2.032,-9.748) R34.2@2.032,-8.064 3.67,-8.064 D2.2@4.521,-8.915
NetD5_1: D5.1 R18.1 R19.1 U3.7 | length 26.7
  Top Layer w0.45: R19.1@24.521,-7.249 cw(c23.011,-8.758) 25.146,-8.758 ; D5.1@24.669,-9.558 ccw(c23.516,-8.405) 25.146,-8.405 ccw(c26.776,-8.405) D5.1@25.623,-9.558 ; R19.1@24.839,-6.931 cw(c24.098,-7.672) 25.146,-7.672 ; R19.1@24.892,-6.353 ccw(c24.892,-5.085) 25.788,-5.981 ccw(c26.684,-6.878) R19.1@25.417,-6.878 ; D5.1@25.146,-10.135 25.146,-7.132 R19.1@24.892,-6.878 26.372,-5.397 R18.1@28.702,-5.397 28.96,-5.656 U3.7@28.96,-8.375 ; R18.1@28.574,-5.564 cw(c27.641,-6.497) 28.96,-6.497 ; R18.1@28.574,-5.526 ccw(c28.264,-5.835) 28.264,-5.397 ccw(c28.264,-4.96) R18.1@28.574,-5.269
  Top Layer w0.65: R19.1@24.591,-7.178 cw(c23.253,-8.517) 25.146,-8.517 ; D5.1@24.739,-9.628 ccw(c23.758,-8.647) 25.146,-8.647 ccw(c26.534,-8.647) D5.1@25.553,-9.628 ; R19.1@24.892,-6.878 25.146,-7.132 D5.1@25.146,-10.135
NetD6_1: D6.1 R21.1 R22.2 U3.6 | length 32
  Top Layer w0.45: R21.1@21.473,-7.249 cw(c20.577,-8.145) 21.844,-8.145 cw(c23.111,-8.145) R21.1@22.215,-7.249 ; D6.1@21.621,-9.558 ccw(c21.082,-9.019) 21.844,-9.019 ; D6.1@21.844,-10.135 v1(21.844,-8.148) R21.1@21.844,-6.878 ; 21.844,-9.062 ccw(c22.847,-9.062) D6.1@22.235,-9.857 ; v1(21.844,-8.148) ccw(c23.551,-8.148) D6.1@22.51,-9.5 ; U3.6@30.23,-8.375 v1(30.23,-6.35) 30.23,-5.647 R22.2@30.48,-5.397 ; v1@30.23,-6.383 cw(c31.306,-6.383) R22.2@30.599,-5.572
  Top Layer w0.65: R21.1@21.543,-7.178 cw(c20.205,-8.517) 22.098,-8.517 ; D6.1@21.691,-9.628 ccw(c20.71,-8.647) 22.098,-8.647 ccw(c23.486,-8.647) D6.1@22.505,-9.628 ; v1@21.826,-8.165 cw(c21.17,-8.821) 22.098,-8.821 ; v1@21.826,-8.13 ccw(c21.17,-7.474) R21.1@22.098,-7.474 ; R21.1@21.844,-6.878 22.098,-7.132 D6.1@22.098,-10.135
  Bottom Layer w0.4: v1(21.844,-8.148) 29.957,-8.148 30.23,-7.874 v1(30.23,-6.35) ; v1@21.95,-8.254 cw(c22.206,-8.51) 22.206,-8.148 cw(c22.206,-7.785) v1@21.95,-8.042 ; v1@30.124,-6.456 cw(c29.868,-6.712) 30.23,-6.712 cw(c30.592,-6.712) v1@30.336,-6.456
NetD7_1: D7.1 R26.1 R27.2 U4.7 | length 29.2
  Top Layer w0.45: D7.1@7.143,-9.558 ccw(c5.99,-8.405) 7.62,-8.405 ccw(c9.25,-8.405) D7.1@8.097,-9.558 ; R26.1@7.249,-7.249 cw(c6.353,-8.145) 7.62,-8.145 cw(c8.887,-8.145) R26.1@7.991,-7.249 ; D7.1@7.62,-10.135 v1(7.62,-8.148) R26.1@7.62,-6.878 ; v1(13.271,-5.143) R27.2@14.478,-5.143 R27.2@14.414,-5.08 ; R27.2@14.35,-5.31 cw(c13.417,-6.243) 14.736,-6.243 ; R27.2@14.35,-5.272 ccw(c14.04,-5.581) 14.04,-5.143 ccw(c14.04,-4.706) R27.2@14.35,-5.015 ; U4.7@14.736,-8.375 R27.2@14.736,-5.402
  Top Layer w0.65: D7.1@7.213,-9.628 ccw(c6.232,-8.647) 7.62,-8.647 ccw(c9.008,-8.647) D7.1@8.027,-9.628 ; R26.1@7.319,-7.178 cw(c6.594,-7.904) 7.62,-7.904 cw(c8.646,-7.904) R26.1@7.921,-7.178 ; D7.1@7.62,-10.135 R26.1@7.62,-6.878
  Bottom Layer w0.45: v1(7.62,-8.148) 7.62,-5.588 8.064,-5.143 v1(13.271,-5.143)
NetD8_1: D8.1 R30.1 R31.1 U4.6 | length 25.5
  Top Layer w0.45: D8.1@10.191,-9.558 ccw(c9.038,-8.405) 10.668,-8.405 ccw(c12.298,-8.405) D8.1@11.145,-9.558 ; R31.1@10.297,-7.249 cw(c9.401,-8.145) 10.668,-8.145 cw(c11.935,-8.145) R31.1@11.039,-7.249 ; D8.1@10.668,-10.135 v1(10.668,-8.148) R31.1@10.668,-6.878 ; R30.1@15.874,-5.31 cw(c15.554,-5.63) 16.006,-5.63 ; R30.1@16.002,-5.143 16.006,-5.148 v1(16.006,-6.096) U4.6@16.006,-8.375 ; 16.006,-5.609 cw(c16.43,-5.609) R30.1@16.13,-5.31
  Top Layer w0.65: D8.1@10.261,-9.628 ccw(c9.28,-8.647) 10.668,-8.647 ccw(c12.056,-8.647) D8.1@11.075,-9.628 ; R31.1@10.367,-7.178 cw(c9.642,-7.904) 10.668,-7.904 cw(c11.694,-7.904) R31.1@10.969,-7.178 ; D8.1@10.668,-9.906 R31.1@10.668,-6.878
  Bottom Layer w0.45: v1(10.668,-8.148) 10.668,-6.858 11.43,-6.096 13.208,-6.096 v1(16.006,-6.096)
NetJ5_9: J5.9 RP1.5 | length 16.4
  Top Layer w0.254: RP1.5@35.917,-26.446 42.334,-26.446 ; RP1.5@36.325,-26.604 cw(c36.705,-26.984) 36.705,-26.446 cw(c36.705,-25.908) RP1.5@36.325,-26.288 ; J5.9@39.497,-20.461 40.501,-20.461 41.228,-21.188 41.83,-21.188 42.524,-21.188 43.126,-21.79 43.126,-25.627 42.334,-26.419 42.334,-26.427
NetJ5_11: J5.11 RP1.6 | length 12.4
  Top Layer w0.254: RP1.6@35.917,-25.546 42.272,-25.546 42.672,-25.146 42.672,-23.876 42.306,-23.51 40.894,-23.51 39.845,-22.461 J5.11@39.497,-22.461 ; RP1.6@36.354,-25.633 cw(c36.564,-25.843) 36.564,-25.546 cw(c36.564,-25.249) RP1.6@36.354,-25.459
NetJ5_12: J5.12 R33.1 | length 6.6
  Top Layer w0.2: R33.1@37.143,-19.562 R33.1@37.084,-19.621 37.084,-21.082 37.532,-21.53 40.64,-21.53 41.529,-22.419 J5.12@41.529,-22.461
NetJ5_13: J5.13 RP1.7 | length 3.7
  Top Layer w0.5: RP1.7@35.917,-24.746 39.212,-24.746 J5.13@39.497,-24.461
NetJ5_14: J5.14 RP1.8 | length 7.1
  Top Layer w0.2: RP1.8@35.917,-23.846 38.13,-23.846 38.466,-23.51 40.02,-23.51 40.971,-24.461 J5.14@41.529,-24.461 ; RP1.8@36.344,-24.023 cw(c36.771,-24.45) 36.771,-23.846 cw(c36.771,-23.242) RP1.8@36.344,-23.669
NetR4_2: R4.2 U1.5 | length 5.4
  Top Layer w0.4: U1.5@35.512,2.368 36.05,2.368 36.893,1.524 R4.2@36.893,1.016 ; U1.5@35.912,2.368 cw(c35.912,2.036) 36.147,2.271 ; 36.117,2.301 cw(c34.832,1.016) R4.2@36.649,1.016 ; R4.2@36.748,1.162 ccw(c36.395,1.514) 36.893,1.514 ccw(c37.392,1.514) R4.2@37.039,1.162 ; 36.8,1.618 cw(c36.198,1.016) R4.2@37.049,1.016
NetR8_2: R8.2 U1.6 | length 12.7
  Top Layer w0.4: U1.6@35.512,3.018 v1(36.546,3.018) ; v1@36.44,2.912 ccw(c36.184,2.656) 36.184,3.018 ccw(c36.184,3.38) v1@36.44,3.124
  Top Layer w0.45: R8.2@29.653,5.968 cw(c29.344,5.658) 29.781,5.658 cw(c30.219,5.658) R8.2@29.91,5.968 ; v1(29.781,5.397) R8.2@29.781,6.096
  Bottom Layer w0.4: v1@29.675,5.291 cw(c29.419,5.035) 29.781,5.035 cw(c30.144,5.035) v1@29.888,5.291 ; v1(29.781,5.397) 29.781,4 30.114,3.668 35.896,3.668 v1(36.546,3.018) ; v1@36.396,3.018 ccw(c36.034,3.018) 36.29,3.274 ccw(c36.546,3.53) v1@36.546,3.168
NetR9_1: R9.1 U1.8 | length 3.3
  Top Layer w0.4: U1.8@35.512,4.318 R9.1@38.036,4.318 ; 37.54,4.318 ccw(c37.54,4.903) R9.1@37.954,4.489 ; 37.663,4.318 cw(c37.663,3.906) R9.1@37.954,4.197
NetR9_2: R9.2 R10.1 R11.1 | length 9.2
  Top Layer w0.45: R9.2@37.972,2.564 cw(c36.436,1.028) R10.1@38.608,1.028 ; R9.2@38.1,2.73 38.608,2.73 ; R9.2@38.29,2.882 cw(c37.522,2.114) 38.608,2.114 ; R10.1@38.48,1.246 ccw(c38.17,1.556) 38.608,1.556 ccw(c39.046,1.556) R10.1@38.736,1.246 ; R10.1@38.608,1.079 38.608,2.73 ; R11.1@39.496,2.602 ccw(c39.186,2.293) 39.186,2.73 ccw(c39.186,3.168) R11.1@39.496,2.859 ; R11.1@39.624,2.73 38.608,2.73 ; R9.2@38.228,2.602 cw(c38.538,2.293) 38.538,2.73 ; R9.2@38.228,2.602 cw(c38.538,2.293) 38.538,2.73 ; R9.2@38.228,2.602 cw(c38.538,2.293) 38.538,2.73 ; R9.2@38.228,2.859 ccw(c38.538,3.168) 38.538,2.73 ; R9.2@38.228,2.859 ccw(c38.538,3.168) 38.538,2.73 ; R9.2@38.228,2.859 ccw(c38.538,3.168) 38.538,2.73
NetR12_2: R12.2 U1.1 | length 3.8
  Top Layer w0.4: R12.2@31.541,5.95 cw(c31.188,5.598) 31.686,5.598 cw(c32.185,5.598) R12.2@31.832,5.95 ; R12.2@31.686,6.096 31.686,5.397 U1.1@32.766,4.318 ; 32.083,5.001 cw(c31.4,4.318) U1.1@32.366,4.318
NetR15_1: R15.1 R28.2 U32.2 | length 7.6
  Top Layer w0.35: R15.1@1.524,-23.876 3.048,-22.352 R28.2@3.048,-22.225 ; R15.1@1.524,-23.606 ccw(c1.524,-22.956) 1.984,-23.416 ; R15.1@1.755,-23.838 cw(c2.222,-23.838) R15.1@1.892,-23.508 ; 2.59,-22.81 ccw(c2.043,-22.263) R28.2@2.817,-22.263 ; R28.2@2.805,-22.595 cw(c3.048,-22.839) R28.2@3.048,-22.495
  Top Layer w0.65: 2.798,-21.387 ccw(c3.848,-21.387) R28.2@3.106,-22.129 ; U32.2@2.798,-19.551 2.798,-21.975 R28.2@3.048,-22.225
NetR15_2: R15.2 R35.1 U32.1 | length 6.3
  Top Layer w0.4: R35.1@0,-23.876 1.524,-22.352 R15.2@1.524,-22.225 ; R35.1@0,-23.631 ccw(c0,-23.041) 0.417,-23.459 ; R35.1@0.206,-23.838 cw(c0.613,-23.838) R35.1@0.325,-23.551 ; 1.109,-22.767 ccw(c0.605,-22.263) R15.2@1.318,-22.263
  Top Layer w0.65: R15.2@1.524,-22.225 U32.1@1.524,-19.555
NetR17_1: R17.1 R20.1 U3.4 | length 7
  Top Layer w0.45: R17.1@29.76,-17.755 30.48,-17.755 ; R17.1@29.889,-17.883 cw(c30.198,-18.192) 30.198,-17.755 cw(c30.198,-17.317) R17.1@29.889,-17.626 ; 30.484,-17.75 30.48,-17.755 ; R20.1@31.241,-17.883 ccw(c30.931,-18.192) 30.931,-17.755 ccw(c30.931,-17.317) R20.1@31.241,-17.626 ; R20.1@31.241,-17.588 ccw(c30.614,-16.962) 31.5,-16.962 ; U3.4@31.5,-14.471 31.5,-17.623 R20.1@31.369,-17.755 30.48,-17.755
NetR25_1: R25.1 R29.1 U4.4 | length 8
  Top Layer w0.45: R25.1@16.129,-17.755 R29.1@17.653,-17.755 ; R25.1@16.257,-17.883 cw(c16.567,-18.192) 16.567,-17.755 cw(c16.567,-17.317) R25.1@16.257,-17.626 ; R29.1@17.276,-17.742 U4.4@17.276,-14.471 ; R29.1@17.276,-17.455 ccw(c17.914,-17.455) R29.1@17.463,-17.906 ; 17.276,-16.369 ccw(c19.001,-16.369) R29.1@17.781,-17.588 ; R29.1@17.525,-17.883 ccw(c17.215,-18.192) 17.215,-17.755 ccw(c17.215,-17.317) R29.1@17.525,-17.626
NetR35_2: R35.2 U32.5 | length 14.6
  Top Layer w0.35: R35.2@-0.164,-22.023 ccw(c-0.559,-21.628) 0,-21.628 ccw(c0.559,-21.628) R35.2@0.164,-22.023 ; R35.2@0,-22.225 0,-17.018 0.762,-16.256 4.572,-16.256 5.338,-15.49 U32.5@5.338,-13.455 ; U32.5@5.246,-14.512 cw(c5.025,-14.734) 5.338,-14.734 cw(c5.652,-14.734) U32.5@5.43,-14.512
NRST: J1.4 R14.2 U2.2 | length 14.9
  Top Layer w0.2: U2.2@25.085,-35.327 26.183,-35.327 26.183,-41.773 J1.4@26.32,-41.91
  Top Layer w0.45: J1.4@26.32,-41.91 28.448,-44.038 28.448,-45.974 28.194,-46.228 R14.2@26.987,-46.228 ; R14.2@27.154,-46.356 cw(c27.464,-46.666) 27.464,-46.228 cw(c27.464,-45.79) R14.2@27.154,-46.1
OPT01: R1.2 R2.1 U2.49 | length 13.9
  Top Layer w0.2: R1.2@9.537,-42.074 ccw(c9.014,-41.551) 9.754,-41.551 ccw(c10.493,-41.551) R1.2@9.97,-42.074 ; R1.2@9.754,-42.291 9.754,-40.649 10.779,-39.624 14.986,-39.624 15.185,-39.425 U2.49@15.185,-38.227
  Top Layer w0.4: R1.2@9.754,-42.291 R2.1@12.167,-42.291 ; R1.2@9.938,-42.437 cw(c10.29,-42.789) 10.29,-42.291 cw(c10.29,-41.793) R1.2@9.938,-42.145 ; R2.1@11.982,-42.437 ccw(c11.63,-42.789) 11.63,-42.291 ccw(c11.63,-41.793) R2.1@11.982,-42.145
OPT02: R3.2 R6.1 U2.50 | length 17.9
  Top Layer w0.2: v1@10.922,-40.64 11.43,-40.132 ; v1@10.972,-40.889 cw(c11.535,-40.828) 11.134,-40.428 ; v1@11.171,-40.867 cw(c12.069,-40.771) 11.43,-40.132 ; U2.50@15.685,-38.227 15.685,-39.687 15.24,-40.132 11.43,-40.132
  Top Layer w0.4: R3.2@9.754,-43.815 v1(10.922,-43.815) R6.1@12.167,-43.815 ; R3.2@9.938,-43.961 cw(c10.29,-44.313) 10.29,-43.815 cw(c10.29,-43.317) R3.2@9.938,-43.669 ; v1@10.816,-43.921 ccw(c10.56,-44.177) 10.56,-43.815 ccw(c10.56,-43.453) v1@10.816,-43.709 ; v1@11.028,-43.921 cw(c11.284,-44.177) 11.284,-43.815 cw(c11.284,-43.453) v1@11.028,-43.709 ; R6.1@11.982,-43.961 ccw(c11.63,-44.313) 11.63,-43.815 ccw(c11.63,-43.317) R6.1@11.982,-43.669
  Bottom Layer w0.2: v1@10.745,-43.638 ccw(c10.318,-43.211) 10.922,-43.211 ccw(c11.526,-43.211) v1@11.099,-43.638 ; v1@10.745,-41.071 cw(c10.318,-41.498) 10.922,-41.498 cw(c11.526,-41.498) v1@11.099,-41.071 ; v1(10.922,-43.815) v1(10.922,-40.894)
OPT03: R5.2 R7.1 U2.51 | length 18
  Top Layer w0.2: v1(11.938,-41.148) 12.446,-40.64 15.494,-40.64 16.185,-39.949 U2.51@16.185,-38.227 ; v1@11.938,-40.898 ccw(c11.938,-40.294) 12.365,-40.721 ccw(c12.792,-41.148) v1@12.188,-41.148
  Top Layer w0.4: R5.2@9.754,-45.339 v1(10.922,-45.339) R7.1@12.167,-45.339 ; R5.2@9.938,-45.485 cw(c10.29,-45.837) 10.29,-45.339 cw(c10.29,-44.841) R5.2@9.938,-45.193 ; v1@10.816,-45.445 ccw(c10.56,-45.701) 10.56,-45.339 ccw(c10.56,-44.977) v1@10.816,-45.233 ; v1@11.028,-45.445 cw(c11.284,-45.701) 11.284,-45.339 cw(c11.284,-44.977) v1@11.028,-45.233 ; R7.1@11.982,-45.485 ccw(c11.63,-45.837) 11.63,-45.339 ccw(c11.63,-44.841) R7.1@11.982,-45.193
  Bottom Layer w0.2: v1@10.925,-45.289 ccw(c10.959,-44.71) 11.369,-45.12 ; v1@10.937,-45.089 ccw(c10.994,-44.116) 11.684,-44.806 ; v1@11.151,-45.339 11.684,-44.806 ; 11.684,-41.402 11.684,-44.806
OPWM: R37.1 U2.32 | length 5.8
  Top Layer w0.2: R37.1@12.002,-23.876 14.224,-23.876 15.185,-24.837 U2.32@15.185,-25.927 ; R37.1@12.256,-24.093 cw(c12.779,-24.616) 12.779,-23.876 cw(c12.779,-23.136) R37.1@12.256,-23.659
RELAY_HEAT: J6.5 U5.16 | length 5.7
  Top Layer w0.4: J6.5@-4.318,-40.513 -4.191,-40.386 U5.16@0.762,-40.386 ; U5.16@-0.094,-40.492 ccw(c-0.35,-40.748) -0.35,-40.386 ccw(c-0.35,-40.024) U5.16@-0.094,-40.28
RELAY_HIGH: J2.9 U5.11 | length 35.2
  Top Layer w0.2: U5.11@-0.183,-34.057 -0.162,-34.036 U5.11@0.762,-34.036
  Top Layer w0.4: v1(-0.762,-34.036) U5.11@0.762,-34.036 ; v1@-0.656,-34.142 cw(c-0.4,-34.398) -0.4,-34.036 cw(c-0.4,-33.674) v1@-0.656,-33.93 ; U5.11@-0.094,-34.142 ccw(c-0.35,-34.398) -0.35,-34.036 ccw(c-0.35,-33.674) U5.11@-0.094,-33.93
  Bottom Layer w0.35: v1@-0.886,-33.912 ccw(c-1.184,-33.614) -0.762,-33.614 ccw(c-0.34,-33.614) v1@-0.638,-33.912 ; v1(-0.762,-34.036) -0.762,-27.94 0.254,-26.924 0.254,-13.208 -1.524,-11.43 -1.524,-6.412 J2.9@-0.046,-4.934
RELAY_IN1: U2.38 U5.1 | length 16
  Top Layer w0.2: U5.1@6.35,-40.386 9.144,-40.386 10.382,-39.148 10.382,-31.242 10.797,-30.827 U2.38@12.785,-30.827 ; U5.1@7.277,-40.563 cw(c7.704,-40.99) 7.704,-40.386 cw(c7.704,-39.782) U5.1@7.277,-40.209
RELAY_IN2: U2.37 U5.2 | length 15.6
  Top Layer w0.2: U5.2@6.35,-39.116 9.398,-39.116 9.982,-38.532 9.982,-30.734 10.389,-30.327 U2.37@12.785,-30.327 ; U5.2@7.277,-39.293 cw(c7.704,-39.72) 7.704,-39.116 cw(c7.704,-38.512) U5.2@7.277,-38.939
RELAY_IN3: U2.36 U5.3 | length 14.9
  Top Layer w0.2: U5.3@6.35,-37.846 9.144,-37.846 9.582,-37.408 9.582,-30.226 9.981,-29.827 U2.36@12.785,-29.827 ; U5.3@7.277,-38.023 cw(c7.704,-38.45) 7.704,-37.846 cw(c7.704,-37.242) U5.3@7.277,-37.669
RELAY_IN4: U2.35 U5.4 | length 14.1
  Top Layer w0.2: U5.4@6.35,-36.576 8.636,-36.576 9.182,-36.03 9.182,-29.718 9.573,-29.327 U2.35@12.785,-29.327 ; U5.4@7.277,-36.753 cw(c7.704,-37.18) 7.704,-36.576 cw(c7.704,-35.972) U5.4@7.277,-36.399
RELAY_IN5: U2.34 U5.5 | length 13.4
  Top Layer w0.2: U5.5@6.35,-35.306 8.382,-35.306 8.782,-34.906 8.782,-29.21 9.165,-28.827 U2.34@12.785,-28.827 ; U5.5@7.277,-35.483 cw(c7.704,-35.91) 7.704,-35.306 cw(c7.704,-34.702) U5.5@7.277,-35.129
RELAY_IN6: U2.33 U5.6 | length 12.7
  Top Layer w0.2: U5.6@6.35,-34.036 8.128,-34.036 8.382,-33.782 8.382,-28.702 8.757,-28.327 U2.33@12.785,-28.327 ; U5.6@7.277,-34.213 cw(c7.704,-34.64) 7.704,-34.036 cw(c7.704,-33.432) U5.6@7.277,-33.859
RELAY_LINK: J6.4 U5.15 | length 8.3
  Top Layer w0.4: J6.4@-4.318,-38.56 cw(c-4.318,-39.979) -3.315,-38.976 cw(c-2.312,-37.973) J6.4@-3.731,-37.973 ; J6.4@-4.318,-37.973 -3.175,-39.116 U5.15@0.762,-39.116 ; U5.15@-0.094,-39.222 ccw(c-0.35,-39.478) -0.35,-39.116 ccw(c-0.35,-38.754) U5.15@-0.094,-39.01
RELAY_LOW: J6.2 U5.13 | length 10.4
  Top Layer w0.4: J6.2@-4.318,-32.893 -3.175,-32.893 ; J6.2@-3.84,-33.235 cw(c-3.175,-33.711) -3.175,-32.893 ; J6.2@-3.84,-32.551 ccw(c-3.175,-32.075) -3.175,-32.893 ; U5.13@-0.094,-36.682 ccw(c-0.35,-36.938) -0.35,-36.576 ccw(c-0.35,-36.214) U5.13@-0.094,-36.47 ; U5.13@0.762,-36.576 -2.286,-36.576 -2.54,-36.322 -2.54,-33.528 -3.175,-32.893
RELAY_MID: J2.10 U5.12 | length 35.9
  Top Layer w0.4: v1(-1.27,-35.306) U5.12@0.762,-35.306 ; v1@-1.164,-35.412 cw(c-0.908,-35.668) -0.908,-35.306 cw(c-0.908,-34.944) v1@-1.164,-35.2 ; U5.12@-0.094,-35.412 ccw(c-0.35,-35.668) -0.35,-35.306 ccw(c-0.35,-34.944) U5.12@-0.094,-35.2
  Bottom Layer w0.35: J2.10@-2.586,-4.934 -2.586,-11.146 -0.508,-13.224 -0.508,-26.67 -1.524,-27.686 -1.524,-35.052 v1(-1.27,-35.306) ; -1.524,-34.27 ccw(c-0.234,-34.27) v1@-1.146,-35.182
RELAY_OPEN: J6.3 U5.14 | length 9.5
  Top Layer w0.4: J6.3@-4.318,-35.433 -3.408,-35.433 ; J6.3@-4.192,-35.571 cw(c-3.731,-36.075) -3.249,-35.592 ; J6.3@-3.783,-35.675 cw(c-3.408,-35.844) -3.408,-35.433 ; J6.3@-3.783,-35.191 ccw(c-3.408,-35.022) -3.408,-35.433 ; U5.14@-0.094,-37.952 ccw(c-0.35,-38.208) -0.35,-37.846 ccw(c-0.35,-37.484) U5.14@-0.094,-37.74 ; U5.14@0.762,-37.846 -2.54,-37.846 -3.14,-37.246 -3.14,-35.701 -3.408,-35.433
RS485_EN: D9.6 R23.2 RP1.2 U3.2 U3.3 | length 29.1
  Top Layer w0.4: v1(26.416,-20.574) 26.416,-21.082 26.67,-21.336 29.21,-21.336 29.972,-22.098 D9.6@29.972,-23.67 29.972,-24.384 30.334,-24.746 RP1.2@34.187,-24.746 ; 26.416,-20.936 ccw(c26.054,-20.936) 26.31,-20.68 cw(c26.054,-20.936) 26.416,-20.936 ; 26.416,-20.936 cw(c26.778,-20.936) 26.522,-20.68 ccw(c26.778,-20.936) 26.416,-20.936
  Top Layer w0.45: R23.2@26.542,-17.588 ccw(c26.232,-17.278) 26.67,-17.278 ccw(c27.108,-17.278) R23.2@26.798,-17.588 ; R23.2@26.67,-17.755 v1(26.67,-16.764) 26.67,-12.57 27.048,-12.192 28.448,-12.192 28.96,-12.704 U3.2@28.96,-14.471 U3.3@30.23,-14.471
  Bottom Layer w0.4: v1@26.31,-20.468 ccw(c25.964,-20.122) 26.453,-20.122 ; v1@26.453,-20.537 26.453,-16.801 26.49,-16.764 v1(26.67,-16.764) ; 26.453,-17.65 cw(c27.556,-17.65) v1@26.776,-16.87
RS485_EN2: R32.2 U2.24 U4.2 U4.3 | length 28.2
  Top Layer w0.2: R32.2@12.864,-17.971 ccw(c12.341,-18.494) 12.341,-17.755 ccw(c12.341,-17.015) R32.2@12.864,-17.538 ; R32.2@13.081,-17.755 12.217,-17.755 11.938,-18.034 11.938,-20.828 12.446,-21.336 18.796,-21.336 19.185,-21.725 U2.24@19.185,-25.927
  Top Layer w0.45: R32.2@12.706,-17.38 ccw(c13.081,-17.005) R32.2@13.081,-17.535 ; R32.2@13.081,-17.755 12.446,-17.12 12.446,-12.7 12.7,-12.446 14.231,-12.446 14.732,-12.947 U4.2@14.732,-14.503 ; U4.2@14.736,-14.471 U4.3@16.006,-14.471
RS485_RX2: R24.1 U2.22 U4.1 | length 20.9
  Top Layer w0.2: v1(18.161,-16.637) 18.542,-17.018 ; v1@18.182,-16.886 cw(c18.22,-17.34) 18.542,-17.018 ; v1@18.41,-16.658 ccw(c18.864,-16.696) 18.542,-17.018 ; U2.22@20.185,-25.927 20.185,-20.439 19.558,-19.812 18.796,-19.812 18.542,-19.558 18.542,-17.018
  Top Layer w0.45: U4.1@13.466,-14.471 13.466,-16.256 13.847,-16.637 v1(14.605,-16.637) R24.1@14.605,-17.755 ; R24.1@14.477,-17.588 ccw(c14.167,-17.278) 14.605,-17.278 ccw(c15.043,-17.278) R24.1@14.733,-17.588
  Bottom Layer w0.4: v1(14.605,-16.637) v1(18.161,-16.637) ; v1@14.711,-16.743 cw(c14.967,-16.999) 14.967,-16.637 cw(c14.967,-16.275) v1@14.711,-16.531 ; v1@18.055,-16.743 ccw(c17.799,-16.999) 17.799,-16.637 ccw(c17.799,-16.275) v1@18.055,-16.531
RS485_RXD: D10.4 R16.1 R33.2 U3.1 | length 19.9
  Top Layer w0.4: 27.69,-16.334 ccw(c28.225,-16.334) v1@27.847,-16.713 ; U3.1@27.69,-14.471 27.69,-16.768 v1(27.741,-16.819) ; v1(32.437,-18.848) 32.639,-19.05 34.544,-19.05 35.179,-18.415 D10.4@35.179,-17.828 R33.2@36.942,-17.828 ; v1@32.543,-18.742 ccw(c33.287,-17.999) 33.287,-19.05 ; 34.855,-18.739 ccw(c34.195,-18.078) D10.4@35.129,-18.078 ; 36.334,-17.828 cw(c36.334,-18.683) R33.2@36.938,-18.078
  Top Layer w0.45: v1(27.741,-16.819) 28.194,-17.272 R16.1@28.194,-17.755 ; R16.1@28.066,-17.588 ccw(c27.756,-17.278) 28.194,-17.278 ccw(c28.632,-17.278) R16.1@28.322,-17.588
  Bottom Layer w0.4: v1@27.635,-16.925 cw(c27.379,-17.181) 27.741,-17.181 cw(c28.103,-17.181) v1@27.847,-16.925 ; v1(27.741,-16.819) 27.741,-18.47 28.119,-18.848 v1(32.437,-18.848) ; v1@32.331,-18.954 ccw(c32.075,-19.21) 32.075,-18.848 ccw(c32.075,-18.486) v1@32.331,-18.742
RS485_TX2: R29.2 U2.23 | length 9.3
  Top Layer w0.2: R29.2@17.653,-19.406 17.653,-19.939 ; U2.23@19.685,-25.927 19.685,-20.505 19.5,-20.32 18.034,-20.32 17.653,-19.939 ; 17.653,-19.939 ccw(c17.406,-19.939) 17.516,-19.718 cw(c17.406,-19.939) 17.653,-19.939 ; 17.653,-19.939 cw(c17.9,-19.939) 17.79,-19.718 ccw(c17.9,-19.939) 17.653,-19.939
RS485_TXD: D10.3 R20.2 RP1.1 | length 12.4
  Top Layer w0.4: R20.2@31.232,-19.58 ccw(c31.791,-19.022) 31.791,-19.812 ; R20.2@31.369,-19.65 cw(c31.369,-20.24) 31.786,-19.823 ; R20.2@31.369,-19.406 31.775,-19.812 34.798,-19.812 35.174,-20.188 D10.3@35.174,-20.828 35.174,-21.976 34.187,-22.963 RP1.1@34.187,-23.846 ; R20.2@31.515,-19.298 ccw(c32.757,-18.056) 32.757,-19.812 ; R20.2@31.575,-19.444 ccw(c31.982,-19.444) R20.2@31.694,-19.731 ; RP1.1@34.081,-23.74 ccw(c33.825,-23.484) 34.187,-23.484 ccw(c34.549,-23.484) RP1.1@34.293,-23.74 ; 34.813,-19.827 cw(c34.062,-20.578) D10.3@35.124,-20.578
RS485A: J3.9 R21.2 | length 20.9
  Top Layer w0.45: J3.9@11.351,2.125 ccw(c10.801,2.714) 11.607,2.714 ; J3.9@11.607,1.851 11.607,2.714 ; J3.9@11.862,2.125 cw(c12.412,2.714) 11.607,2.714 ; R21.2@21.473,-3.077 ccw(c20.668,-2.273) 21.806,-2.273 ; R21.2@21.806,-3.531 21.806,2.324 20.831,3.299 12.192,3.299 11.607,2.714 ; 21.806,-2.089 ccw(c23.203,-2.089) R21.2@22.215,-3.077
RS485A2: J3.10 R31.2 | length 7.3
  Top Layer w0.4: R31.2@10.279,-3.06 ccw(c9.34,-2.121) 10.668,-2.121 ccw(c11.996,-2.121) R31.2@11.057,-3.06 ; R31.2@10.668,-3.449 10.668,-1.088 J3.10@11.607,-0.149 ; J3.10@11.207,-0.149 cw(c10.241,-0.149) 10.924,-0.832 cw(c11.607,-1.515) J3.10@11.607,-0.549
RS485B: J3.7 R19.2 | length 26.7
  Top Layer w0.45: J3.7@9.341,2.116 ccw(c8.701,2.756) 9.607,2.756 ccw(c10.512,2.756) J3.7@9.872,2.116 ; J3.7@9.607,1.851 9.607,3.257 10.414,4.064 22.606,4.064 24.854,1.816 R19.2@24.854,-3.531 ; R19.2@24.521,-3.077 ccw(c23.716,-2.273) 24.854,-2.273 ; 24.854,-2.089 ccw(c26.251,-2.089) R19.2@25.263,-3.077
RS485B2: J3.8 R26.2 | length 8
  Top Layer w0.4: R26.2@7.234,-3.057 ccw(c6.328,-2.136) 7.62,-2.136 ; R26.2@7.62,-3.449 7.62,-2.136 ; R26.2@8.006,-3.057 cw(c8.912,-2.136) 7.62,-2.136 ; J3.8@9.207,-0.149 cw(c8.241,-0.149) 8.924,-0.832 cw(c9.607,-1.515) J3.8@9.607,-0.549 ; J3.8@9.607,-0.149 7.62,-2.136
  Top Layer w0.45: R26.2@7.62,-3.449 R26.2@7.62,-3.152
SWDIO: J1.2 U2.1 | length 11.1
  Top Layer w0.2: J1.2@21.957,-41.327 ccw(c21.549,-40.672) 22.32,-40.672 ; J1.2@22.062,-41.496 ccw(c21.773,-41.032) 22.32,-41.032 ccw(c22.867,-41.032) J1.2@22.578,-41.496 ; J1.2@22.32,-41.91 22.32,-40.672 ; J1.2@22.683,-41.327 cw(c23.091,-40.672) 22.32,-40.672 ; U2.1@25.085,-35.827 25.085,-39.939 24.638,-40.386 22.606,-40.386 22.32,-40.672
UART_EX_RX1: D9.1 RP1.3 U2.15 | length 12.8
  Top Layer w0.2: U2.15@25.085,-28.827 26.037,-28.827 26.67,-28.194 29.464,-28.194 29.972,-27.686 D9.1@29.972,-26.67 ; D9.1@29.866,-27.026 cw(c29.61,-27.282) 29.972,-27.282 cw(c30.334,-27.282) D9.1@30.078,-27.026
  Top Layer w0.4: D9.1@29.972,-26.67 29.972,-26.035 30.461,-25.546 RP1.3@34.187,-25.546 ; D9.1@30.022,-26.42 cw(c31.072,-26.42) 30.33,-25.677